# Altium PCB BÖHM_Project.PcbDoc
Units mm, origin at the board's own origin, x right, y up, seen from the top; angles counter-clockwise.
Board outline 106 x 46 mm, 2 copper layers (Top Layer, Bottom Layer); 64 components, 50 nets, 250 pads, 175 vias.
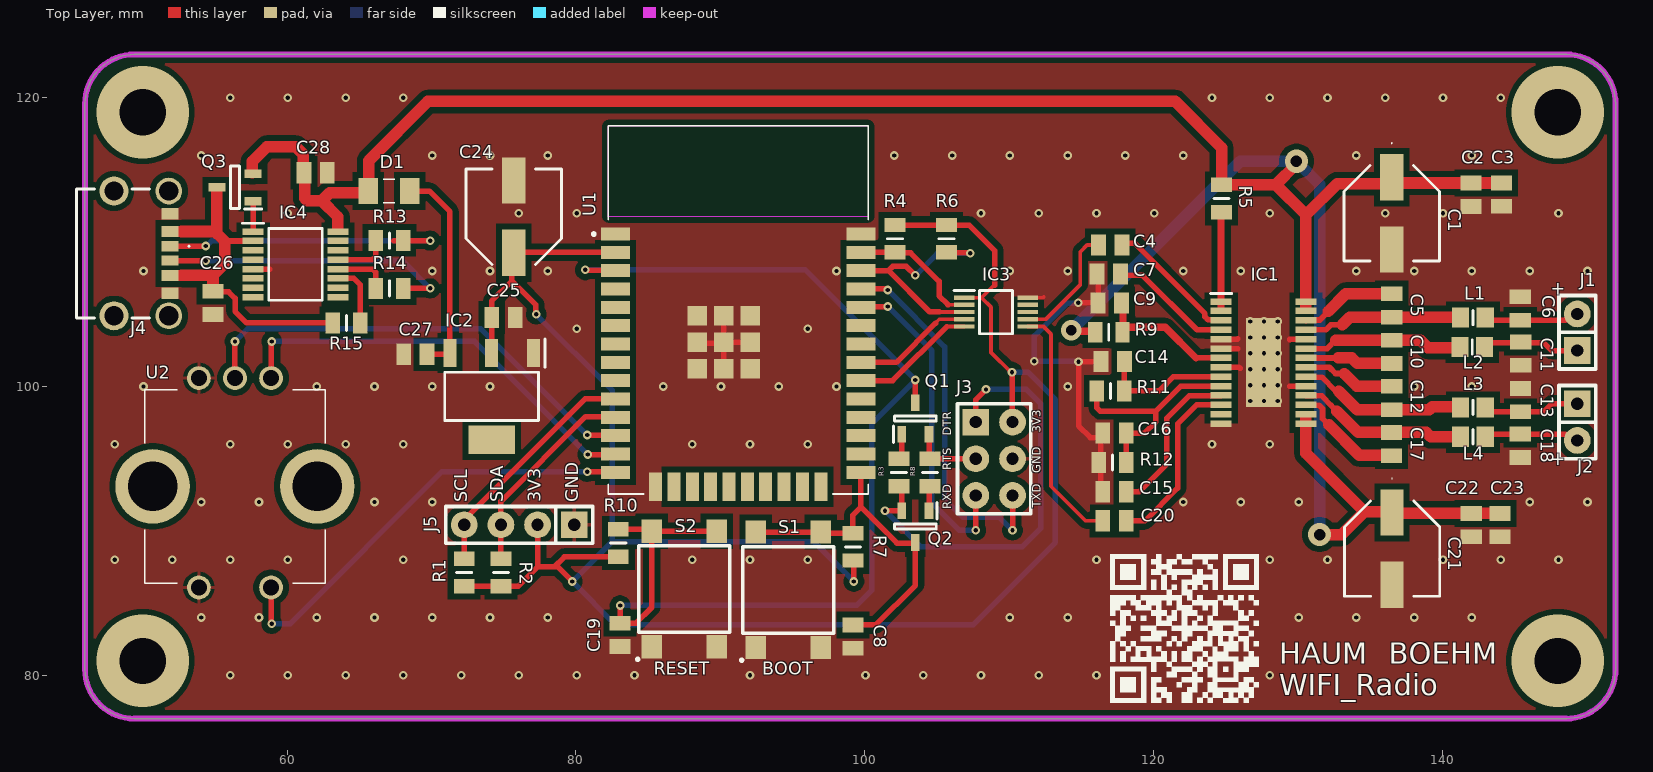
[diagram p0: Top Layer view]
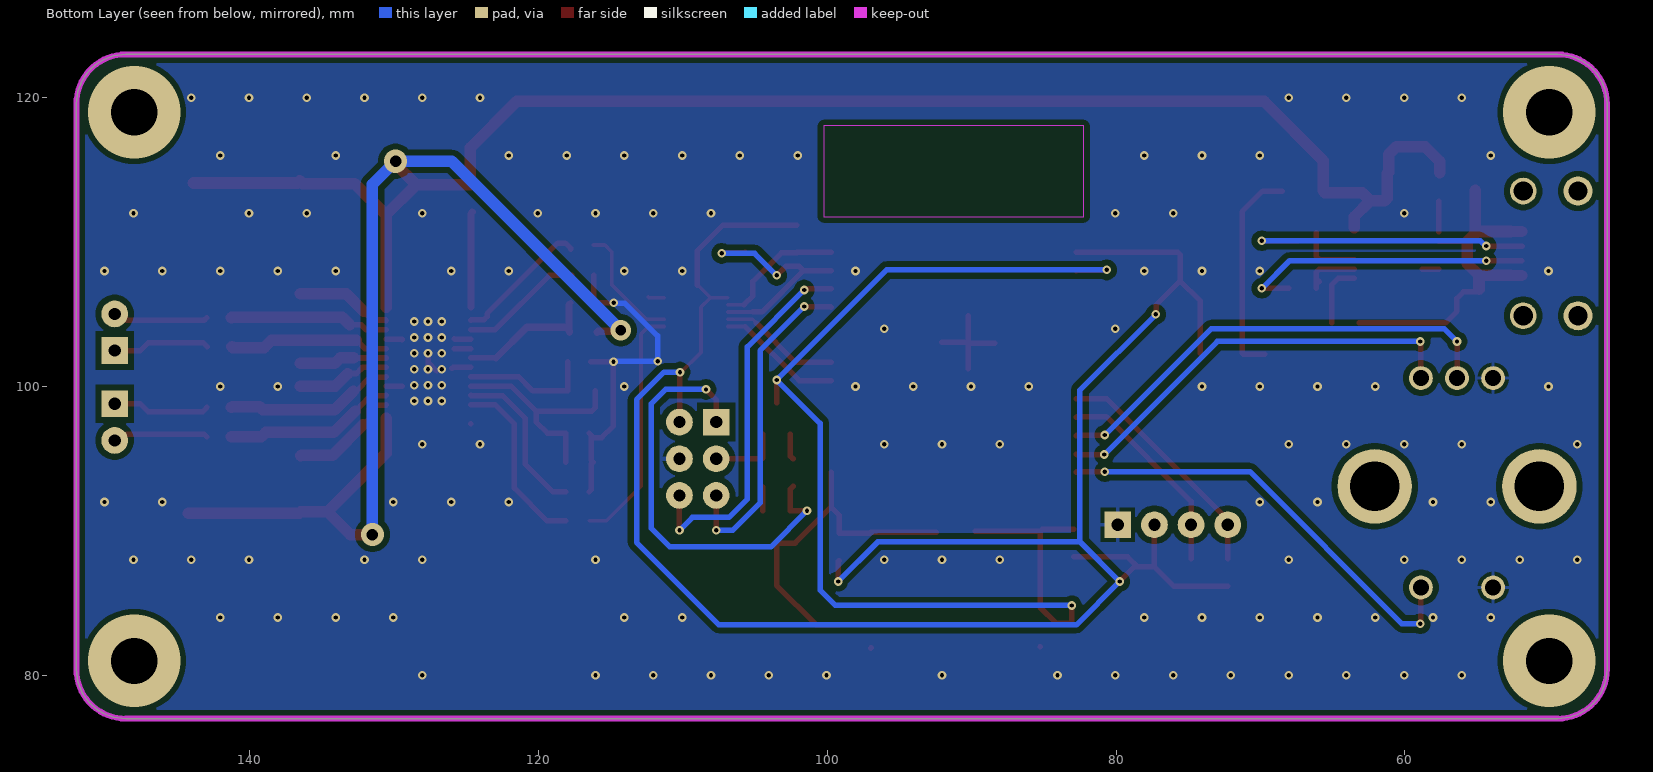
[diagram p1: Bottom Layer view, seen from below]

## Layer stack, top to bottom
Top Solder: solder mask 0.0102, Solder Resist, Dk 3.5
Top Layer: signal copper 0.0356
Dielectric 1: dielectric 0.32, FR-4, Dk 4.8
Bottom Layer: signal copper 0.0356
Bottom Solder: solder mask 0.0102, Solder Resist, Dk 3.5

## Board outline
49.414,77 cw(c49.414,80.414) 46,80.414 46,119.586 cw(c49.414,119.586) 49.414,123 148.586,123 cw(c148.586,119.586) 152,119.586 152,80.414 cw(c148.586,80.414) 148.586,77

## Design rules (kind name [scope] priority, off if disabled: settings)
Clearance [All] p1: gap=0.4 ignorepadtopadclearanceinfootprint=TRUE except(0.2: Arc-Arc Arc-Track Arc-SMDPad Arc-THPad Arc-Via Arc-Text Arc-Hole Track-Track Track-SMDPad Track-THPad Track-Via Track-Text Track-Hole SMDPad-SMDPad SMDPad-THPad SMDPad-Via SMDPad-Text SMDPad-Hole THPad-THPad THPad-Via THPad-Text THPad-Hole Via-Via Via-Text Via-Hole Text-Text Text-Hole)
PolygonConnect [All] p1: thpad.connectstyle=Relief thpad.reliefconductorwidth=0.254 thpad.reliefentries=4 thpad.polygonreliefangle="90 Angle" thpad.airgapwidth=0.254 smdpad.connectstyle=Direct smdpad.reliefconductorwidth=0.254 smdpad.reliefentries=4 smdpad.polygonreliefangle="90 Angle" smdpad.airgapwidth=0.254 via.connectstyle=Direct via.reliefconductorwidth=0.254 via.reliefentries=4 via.polygonreliefangle="90 Angle" via.airgapwidth=0.254
RoutingVias [All] p1: holewidth=0.711 width=1.27 viastyle="Through Hole" minholewidth=0.711 minwidth=1.27 maxholewidth=0.711 maxwidth=1.27
SolderMaskExpansion SolderMaskExpansion_1 [IsVia] p1: expansion=-2 istentingtop=TRUE
SolderMaskExpansion [All] p2: expansion=0.102 istentingtop=FALSE
Width [All] p1: maxlimit=5 minlimit=0.254 preferedwidth=0.35
30 further rules are at their usual default settings.

## Components (designator, comment, footprint, x,y, rotation, side; value= is the part's Value field where it differs from the comment)
C1 "EEE-FN1V101XP" EEE0JA331XP 136.5,112 r270 top
C2 "0.1 uF" CAPC2012X94N 141.986,113.284 r90 top
C3 "1000 pF" CAPC2012X94N 144.1,113.29 r90 top
C4 "1 uF" CAPC2012X94N 117,109.8 r180 top
C5 "0.22 uF" CAPC2012X94N 136.5,105.61 r90 top
C6 "1000 pF" CAPC2012X94N 145.4,105.4 r90 top
C7 "1 uF" CAPC2012X94N 116.9,107.8 r180 top
C8 "100 nF" CAPC2012X94N 99.187,82.677 r270 top
C9 "1 uF" CAPC2012X94N 116.967,105.791 r180 top
C10 "0.22 uF" CAPC2012X94N 136.5,102.4 r90 top
C11 "1000 pF" CAPC2012X94N 145.425,102.275 r270 top
C12 "0.22 uF" CAPC2012X94N 136.5,99.2 r90 top
C13 "1000 pF" CAPC2012X94N 145.415,99.06 r90 top
C14 "1 uF" CAPC2012X94N 117.173,101.727 r0 top
C15 "1 uF" CAPC2012X94N 117.3,92.71 r180 top
C16 "1 uF" CAPC2012X94N 117.3,96.774 r0 top
C17 "0.22 uF" CAPC2012X94N 136.477,96.012 r90 top
C18 "1000 pF" CAPC2012X94N 145.4,95.9 r270 top
C19 "100 nF" CAPC2012X94N 83.058,82.804 r270 top
C20 "1 uF" CAPC2012X94N 117.3,90.7 r180 top
C21 "EEE-FN1V101XP" EEE0JA331XP 136.525,88.773 r270 top
C22 "0.1 uF" CAPC2012X94N 142,90.4 r90 top
C23 "1000 pF" CAPC2012X94N 144,90.4 r90 top
C24 "EEE-FN1V101XP" EEE0JA331XP 75.692,111.76 r90 top
C25 "10 uF" CAPC2012X94N 74.978,104.775 r180 top
C26 "1 uF" CAPC2012X94N 54.864,105.791 r90 top
C27 "10 uF" CAPC2012X94N 68.882,102.235 r180 top
C28 "10 uF" CAPC2012X94N 61.976,114.808 r180 top
D1 "1N4148W_RHG" 1N4148WRHG 67.056,113.538 r180 top
IC1 "TPA3110D2PWP" SOP65P640X120-29N 127.618,101.656 r0 top
IC2 "AMS1117-5.0" SOT290P700X180-4N 74.168,99.314 r270 top
IC3 "MCP4728A0T-E_UNVAO" SOP50P490X110-10N 109.093,105.156 r0 top
IC4 "IP2721" SOP65P640X120-16N 60.579,108.458 r0 top
J1 "CON2" SIP-2 149.352,103.759 r90 top
J2 "CON2" SIP-2 149.352,97.536 r270 top
J3 "CON2x3" PFOSTEN_2x3 108.966,94.996 r270 top
J4 "10164359-00011LF" 1016435900011LF 48.856,109.218 r270 top
J5 "CON4" Sip-4 76.073,90.424 r180 top
L1 "742792031" INDC2012X100N 142.113,104.775 r0 top
L2 "742792031" INDC2012X100N 142.074,102.743 r0 top
L3 "742792031" INDC2012X100N 142.113,98.552 r0 top
L4 "742792031" INDC2012X100N 142.113,96.52 r0 top
Q1 "S8050G" SOT95P240X110-3N 103.505,97.79 r90 top
Q2 "S8050G" SOT95P240X110-3N 103.505,90.297 r270 top
Q3 "AO3400A" SOT95P280X125-3N 56.388,113.792 r180 top
R1 "10 Ω" RESC2012X65N 72.263,87.122 r90 top
R2 "10 Ω" RESC2012X65N 74.803,87.122 r90 top
R3 "10 kΩ" RESC2012X65N 102.362,94.041 r270 top
R4 "10 Ω" RESC2012X65N 102.108,110.236 r270 top
R5 "100 kΩ" RESC2012X65N 124.714,113.03 r90 top
R6 "10 Ω" RESC2012X65N 105.664,110.236 r270 top
R7 "10 kΩ" RESC2012X65N 99.187,88.9 r90 top
R8 "10 kΩ" RESC2012X65N 104.521,94.041 r90 top
R9 "10 Ω" RESC2012X65N 116.901,103.759 r180 top
R10 "10 kΩ" RESC2012X65N 82.931,89.154 r90 top
R11 "10 kΩ" RESC2012X65N 117.033,99.695 r180 top
R12 "10 kΩ" RESC2012X65N 117.16,94.742 r180 top
R13 "5,1 kΩ" RESC2012X65N 67.1,110.1 r180 top
R14 "5,1 kΩ" RESC2012X65N 67.1,106.8 r180 top
R15 "100 kΩ" RESC2012X65N 64.1,104.4 r180 top
S1 "B3FS-1000P" B3FS-1000P 94.706,85.915 r270 top
S2 "B3FS-1000P" B3FS-1000P 87.503,85.979 r270 top
U1 "ESP32-WROOM-32" MODULE_ESP32-WROOM-32 91.24,105.307 r0 top
U2 "PEC11R-4215F-S0012" PEC11R4220FS0024 58.888,86.084 r180 top

## Footprints (in the part's own frame and the unit in brackets; to place one, negate y for a bottom-side part, rotate by r counter-clockwise, add the part's x,y. Pads: shape width x height; smd on the part's side, far side on the other; paste and mask are expansions set on the pad)
1N4148WRHG [mm]
  rect 1.34x1.8 smd: 1(-1.43,0) 2(1.43,0)
  silkscreen extent -0.4,-0.8 0.4,0.8, body extent -1.95,-0.85 1.95,0.85, height 1.15
1016435900011LF [mm]
  rect 0.7x1.2 smd: A5(-0.5,3.03) B5(0.5,3.03)
  rect 0.76x1.2 smd: A9(1.52,3.03) B9(-1.52,3.03)
  rect 0.8x1.2 smd: A12(2.75,3.03) B12(-2.75,3.03)
  round 1.85 hole 1.34: MH1(-4.32,2.95) MH2(4.32,2.95)
  round 2.01 hole 1.34: MH3(-4.32,-0.85) MH4(4.32,-0.85)
  silkscreen extent -4.47,-3.45 4.47,4.4, body extent -4.47,-3.24 4.47,3.66, height 3.25
B3FS-1000P [mm]
  rect 1.6x1.4 smd: 1(4,-2.25) 2(-4,-2.25) 3(4,2.25) 4(-4,2.25)
  silkscreen extent -3,-3.29 4.93,3.15, body extent -4,-3.25 4,3.25, height 3.1
CAPC2012X94N [mm]
  rect 1.02x1.47 smd: 1(-0.81,0) 2(0.81,0)
  body extent -1,-0.63 1,0.63, height 0.94
EEE0JA331XP [mm]
  rect 3.2x1.6 smd: 1(-2.5,0) 2(2.5,0)
  silkscreen extent -4.88,-3.3 3.3,3.3, body extent -3.65,-3.3 3.65,3.3, height 7.7
INDC2012X100N [mm]
  rect 1.2x1.4 smd: 1(-0.85,0) 2(0.85,0)
  silkscreen extent 0,-0.5 0,0.5, body extent -1,-0.6 1,0.6, height 1
MODULE_ESP32-WROOM-32 [mm]
  rect 2x0.9 smd: 1(-8.5,5.26) 2(-8.5,3.99) 3(-8.5,2.72) 4(-8.5,1.45) 5(-8.5,0.18) 6(-8.5,-1.09) 7(-8.5,-2.36) 8(-8.5,-3.63) 9(-8.5,-4.9) 10(-8.5,-6.17) 11(-8.5,-7.44) 12(-8.5,-8.71) 13(-8.5,-9.98) 14(-8.5,-11.25) 25(8.5,-11.25) 26(8.5,-9.98) 27(8.5,-8.71) 28(8.5,-7.44) 29(8.5,-6.17) 30(8.5,-4.9) 31(8.5,-3.63) 32(8.5,-2.36) 33(8.5,-1.09) 34(8.5,0.18) 35(8.5,1.45) 36(8.5,2.72) 37(8.5,3.99) 38(8.5,5.26)
  rect 0.9x2 smd: 15(-5.715,-12.25) 16(-4.445,-12.25) 17(-3.175,-12.25) 18(-1.905,-12.25) 19(-0.635,-12.25) 20(0.635,-12.25) 21(1.905,-12.25) 22(3.175,-12.25) 23(4.445,-12.25) 24(5.715,-12.25)
  rect 1.33x1.33 smd: 39(-2.835,-4.075) 39(-2.835,-2.24) 39(-2.835,-0.405) 39(-1,-4.075) 39(-1,-2.24) 39(-1,-0.405) 39(0.835,-4.075) 39(0.835,-2.24) 39(0.835,-0.405)
  Keep-Out Layer region: 9,6.45 -9,6.45 -9,12.75 9,12.75
  Keep-Out Layer region: 9,6.45 -9,6.45 -9,12.75 9,12.75
  silkscreen extent -10.1,-12.75 9,12.75, body extent -9,-12.75 9,12.75, height 3.2
PEC11R4220FS0024 [mm]
  round 1.65 hole 1.1: 1(0,0) 2(5,0) A1(0,-14.5) B1(5,-14.5) C1(2.5,-14.5)
  round 5.161 hole 3.441: MH1(-3.2,-7) MH2(8.2,-7)
  silkscreen extent -3.75,-13.7 8.75,-0.3, body extent -4.5,-14.7 9.5,0.2, height 26.52
PFOSTEN_2x3 [mm]
  rect 1.85x1.85 hole 0.85 mask+0.102: 1(-2.54,-1.27)
  round 1.85 hole 0.85 mask+0.102: 2(-2.54,1.27) 3(0,-1.27) 4(0,1.27) 5(2.54,-1.27) 6(2.54,1.27)
  silkscreen extent -3.81,-2.54 3.81,2.54
RESC2012X65N [mm]
  rect 1x1.45 smd: 1(-0.95,0) 2(0.95,0)
  silkscreen extent 0,-0.53 0,0.53, body extent -0.77,-0.4 0.77,0.4, height 0.46
SIP-2 [mm]
  rect 1.85x1.85 hole 0.85: 1(-1.27,0)
  round 1.85 hole 0.85: 2(1.27,0)
  silkscreen extent -2.54,-1.27 2.54,1.27
Sip-4 [mm]
  rect 1.85x1.85 hole 0.85: 1(-3.81,0)
  round 1.85 hole 0.85: 2(-1.27,0) 3(1.27,0) 4(3.81,0)
  silkscreen extent -5.08,-1.27 5.08,1.27
SOP50P490X110-10N [mm]
  rect 1.4x0.3 smd: 1(-2.2,1) 2(-2.2,0.5) 3(-2.2,0) 4(-2.2,-0.5) 5(-2.2,-1) 6(2.2,-1) 7(2.2,-0.5) 8(2.2,0) 9(2.2,0.5) 10(2.2,1)
  silkscreen extent -2.9,-1.5 1.15,1.5, body extent -2.45,-1.5 2.45,1.5, height 1.1
SOP65P640X120-16N [mm]
  rect 1.475x0.45 smd: 1(-2.938,2.275) 2(-2.938,1.625) 3(-2.938,0.975) 4(-2.938,0.325) 5(-2.938,-0.325) 6(-2.938,-0.975) 7(-2.938,-1.625) 8(-2.938,-2.275) 9(2.938,-2.275) 10(2.938,-1.625) 11(2.938,-0.975) 12(2.938,-0.325) 13(2.938,0.325) 14(2.938,0.975) 15(2.938,1.625) 16(2.938,2.275)
  silkscreen extent -3.67,-2.48 1.85,2.85, body extent -3.2,-2.48 3.2,2.48, height 1.2
SOP65P640X120-29N [mm]
  rect 1.475x0.45 smd: 1(-2.938,4.225) 2(-2.938,3.575) 3(-2.938,2.925) 4(-2.938,2.275) 5(-2.938,1.625) 6(-2.938,0.975) 7(-2.938,0.325) 8(-2.938,-0.325) 9(-2.938,-0.975) 10(-2.938,-1.625) 11(-2.938,-2.275) 12(-2.938,-2.925) 13(-2.938,-3.575) 14(-2.938,-4.225) 15(2.938,-4.225) 16(2.938,-3.575) 17(2.938,-2.925) 18(2.938,-2.275) 19(2.938,-1.625) 20(2.938,-0.975) 21(2.938,-0.325) 22(2.938,0.325) 23(2.938,0.975) 24(2.938,1.625) 25(2.938,2.275) 26(2.938,2.925) 27(2.938,3.575) 28(2.938,4.225)
  rect 2.4x6.17 smd: 3(0,0)
  silkscreen extent -3.67,4.8 -2.2,4.8, body extent -3.2,-4.85 3.2,4.85, height 1.13
SOT95P240X110-3N [mm]
  rect 1.15x0.6 smd: 1(-1.1,0.95) 2(-1.1,-0.95) 3(1.1,0)
  silkscreen extent -1.68,-1.45 0.18,1.5, body extent -1.2,-1.45 1.2,1.45, height 1.1
SOT95P280X125-3N [mm]
  rect 1.2x0.6 smd: 1(-1.25,0.95) 2(-1.25,-0.95) 3(1.25,0)
  silkscreen extent -1.85,-1.48 0.3,1.5, body extent -1.4,-1.48 1.4,1.48, height 1.25
SOT290P700X180-4N [mm]
  rect 1.95x0.9 smd: 1(-3,2.9) 2(-3,0) 3(-3,-2.9)
  rect 1.95x3.2 smd: 4(3,0)
  silkscreen extent -3.98,-3.25 1.68,3.7, body extent -3.5,-3.25 3.5,3.25, height 1.8

## Part data
C1 C21 C24: "Capacitor Polarised", Manufacturer_Name=Panasonic, Mouser Part Number=667-EEE-FN1V101XP, Arrow Part Number=EEE-FN1V101XP, Arrow Price/Stock=https://www.arrow.com/en/products/eee-fn1v101xp/panasonic, Datasheet Link=http://industrial.panasonic.com/cdbs/www-data/pdf/RDE0000/RDE0000C1259.pdf, Height=7.8mm, Manufacturer_Part_Number=EEE-FN1V101XP, Mouser Price/Stock=https://www.mouser.co.uk/ProductDetail/Panasonic/EEE-FN1V101XP?qs=OlC7AqGiEDmbk%2FCOXeagbw%3D%3D
C2 C3 C4 C5 C6 C7 C8 C9 C10 C11 C12 C13 C14 C15 C16 C17 C18 C19 C20 C22 C23 C25 C26 C27 C28: library part 04026W105KAT2A, "Capacitor", Manufacturer_Name="Kyocera AVX", Mouser Part Number=581-04026W105KAT2A, Datasheet Link=http://www.mouser.com/catalog/supplier/library/pdf/AVXSurfaceMountCeramic.pdf, Height=0.56mm, Manufacturer_Part_Number=04026W105KAT2A, Mouser Price/Stock=https://www.mouser.co.uk/ProductDetail/KYOCERA-AVX/04026W105KAT2A?qs=QKPlp7%252B%252BMySX2WX75ls0%252Bw%3D%3D
D1: "Diode", Arrow Part Number="1N4148W RHG", Manufacturer_Name="Taiwan Semiconductor", Mouser Part Number=821-1N4148WRHG, Arrow Price/Stock=https://www.arrow.com/en/products/1n4148wrhg/taiwan-semiconductor?region=europe, Datasheet Link="https://mouser.componentsearchengine.com/Datasheets/1/1N4148W RHG.pdf", Height=1.15mm, Manufacturer_Part_Number="1N4148W RHG", Mouser Price/Stock=https://www.mouser.co.uk/ProductDetail/Taiwan-Semiconductor/1N4148W-RHG?qs=KwaGCOX4wIag2YPLXylAvA%3D%3D
IC1: "Integrated Circuit", Manufacturer_Name="Texas Instruments", Mouser Part Number=595-TPA3110D2PWP, Arrow Part Number=TPA3110D2PWP, Arrow Price/Stock=https://www.arrow.com/en/products/tpa3110d2pwp/texas-instruments?region=nac, Datasheet Link=http://componentsearchengine.com/Datasheets/3/TPA3110D2PWP.pdf, Height=1.2mm, Manufacturer_Part_Number=TPA3110D2PWP, Mouser Price/Stock=https://www.mouser.co.uk/ProductDetail/Texas-Instruments/TPA3110D2PWP?qs=%252BoZa6nMD7VtKcnryxAFqkA%3D%3D
IC2: "Integrated Circuit", Manufacturer_Name=Shikues, Datasheet Link=https://datasheet.lcsc.com/szlcsc/SK-AMS1117-5-0_C165483.pdf, Height=1.8mm, Manufacturer_Part_Number=AMS1117-5.0
IC3: "Integrated Circuit", Arrow Part Number=MCP4728A0T-E/UNVAO, Manufacturer_Name=Microchip, Mouser Part Number=579-MCP4728A0TEUNVAO, Arrow Price/Stock=https://www.arrow.com/en/products/mcp4728a0t-eunvao/microchip-technology, Datasheet Link=https://www.arrow.com/en/products/mcp4728a0t-eunvao/microchip-technology, Height=1.1mm, Manufacturer_Part_Number=MCP4728A0T-E/UNVAO, Mouser Price/Stock=https://www.mouser.co.uk/ProductDetail/Microchip-Technology/MCP4728A0T-E-UNVAO?qs=5aG0NVq1C4xwp5%2FuVndkIg%3D%3D
IC4: "Integrated Circuit", Manufacturer_Name=INJOINIC, Datasheet Link=https://datasheet.lcsc.com/szlcsc/2006111335_INJOINIC-IP2721_C603176.pdf, Height=1.2mm, Manufacturer_Part_Number=IP2721
J1 J2 J3 J5: "Stecker"
J4: "Connector", Manufacturer_Name=Amphenol, Mouser Part Number=649-10164359-00011LF, Arrow Part Number=10164359-00011LF, Arrow Price/Stock=https://www.arrow.com/en/products/10164359-00011lf/amphenol-fci?region=nac, Datasheet Link=https://cdn.amphenol-cs.com/media/wysiwyg/files/drawing/10164359.pdf, Height=3.41mm, Manufacturer_Part_Number=10164359-00011LF, Mouser Price/Stock=https://www.mouser.co.uk/ProductDetail/Amphenol-FCI/10164359-00011LF?qs=MyNHzdoqoQLpQ%2FmSqA1%252BtQ%3D%3D
L1 L2 L3 L4: "Inductor", Manufacturer_Name="Wurth Elektronik", Mouser Part Number=710-742792031, Datasheet Link=https://componentsearchengine.com/Datasheets/2/742792031.pdf, Height=1mm, Manufacturer_Part_Number=742792031, Mouser Price/Stock=https://www.mouser.co.uk/ProductDetail/Wurth-Elektronik/742792031?qs=Wn16VcyqZWp8eQwMnPa%252Bwg%3D%3D
Q1 Q2: "Transistor BJT NPN", Manufacturer_Name=Galaxy, Height=1.1mm, Manufacturer_Part_Number=S8050G
Q3: "MOSFET (N-Channel)", Manufacturer_Name="Alpha & Omega Semiconductors", Arrow Part Number=AO3400A, Arrow Price/Stock=https://www.arrow.com/en/products/ao3400a/alpha-and-omega-semiconductor?utm_currency=USD&region=nac, Datasheet Link=http://aosmd.com/res/data_sheets/AO3400A.pdf, Height=1.25mm, Manufacturer_Part_Number=AO3400A
R1 R2 R3 R4 R5 R6 R7 R8 R9 R10 R11 R12 R13 R14 R15: library part CPF0805B102RE1, "Resistor", Manufacturer_Name="TE Connectivity", Datasheet Link=http://docs-europe.electrocomponents.com/webdocs/13d1/0900766b813d116f.pdf, Height=0.65mm, Manufacturer_Part_Number=CPF0805B102RE1
S1 S2: "Switch", Manufacturer_Name="Omron Electronics", Mouser Part Number=653-B3FS-1000P, Arrow Part Number=B3FS-1000P, Arrow Price/Stock=https://www.arrow.com/en/products/b3fs-1000p/omron?region=nac, Datasheet Link=https://www.omron.co.jp/ecb/products/pdf/b3fs.pdf, Manufacturer_Part_Number=B3FS-1000P, Mouser Price/Stock=https://www.mouser.co.uk/ProductDetail/Omron-Electronics/B3FS-1000P?qs=ImaqFqjHA4k6odVF2%2FXWpQ%3D%3D
U1: "Bluetooth, WiFi 802.11b/g/n, Bluetooth v4.2 +EDR, Class 1, 2 and 3 Transceiver Module 2.4GHz ~ 2.5GHz Antenna Not Included, U.FL Surface Mount", Package="Module Espressif Systems", Availability="In Stock", Check_prices=https://www.snapeda.com/parts/ESP32-WROOM-32/Espressif+Systems/view-part/?ref=eda, MF="Espressif Systems", MP=ESP32-WROOM-32, Price=None, Purchase-URL=https://pricing.snapeda.com/search/part/ESP32-WROOM-32/?ref=eda, SnapEDA_Link=https://www.snapeda.com/parts/ESP32-WROOM-32/Espressif+Systems/view-part/?ref=snap
U2: "Undefined or Miscellaneous", Manufacturer_Name=Bourns, Mouser Part Number=652-PEC11R-4215F-S12, Arrow Part Number=PEC11R-4215F-S0012, Arrow Price/Stock=https://www.arrow.com/en/products/pec11r-4215f-s0012/bourns?utm_currency=USD&region=nac, Datasheet Link=https://www.bourns.com/docs/Product-Datasheets/PEC11R.pdf, Height=27.5mm, Manufacturer_Part_Number=PEC11R-4215F-S0012, Mouser Price/Stock=https://www.mouser.co.uk/ProductDetail/Bourns/PEC11R-4215F-S0012?qs=Zq5ylnUbLm4GqzIkqVmW4Q%3D%3D

## Via types
v1: diameter 0.6, hole 0.3, Top Layer to Bottom Layer, tented both sides, 150 vias
v2: diameter 0.6, hole 0.3, Top Layer to Bottom Layer, 18 vias
v3: diameter 6.4, hole 3.2, Top Layer to Bottom Layer, 4 vias
v4: diameter 1.6, hole 0.8, Top Layer to Bottom Layer, tented both sides, 2 vias
v5: diameter 1.4, hole 0.7, Top Layer to Bottom Layer, tented both sides, 1 vias

## Nets (pads, with @x,y where several pads share a name; then routed paths per layer and width w, separated by ;. In a path a pad name is that pad's centre, name@x,y a point inside that pad or via, vN(x,y) a via of type N, cw(c..) or ccw(c..) an arc to the next point about the centre after c; other vN are vias at no path point)
3,3V: C24.1 C25.2 IC2.2 IC3.1 J3.2 J5.2 R1.1 R2.1 R4.1 R6.1 R7.1 R10.1 U1.2 | length 147.7
  Top Layer w0.254: IC3.1 108.094,106.156 ; 109,107 108.938,107 108.094,106.156 ; v1(110.2,101) 110.106,101 108.75,102.356 108.75,105.5 108.094,106.156
  Top Layer w0.381: R1.1 R2.1 76.012,86.172 77.343,87.503 ; IC2.2 C25.2 74.168,105.918 75.562,107.312 ; v1(77.25,105) 77.208,105.042 77.208,105.665 75.562,107.312 ; J5.2 77.343,87.503 ; v1(79.75,86.5) 78.747,87.503 78.497,87.503 ; U1.2 75.729,109.297 75.562,109.13 75.562,107.312 ; R10.1 79.198,88.204 78.497,87.503 ; R7.1 99.25,87.887 v1(99.25,86.5) ; R4.1 107.228,111.186 109,109.414 109,107 ; v1(110.2,101) 110.218,100.982 110.218,97.554 J3.2 ; 77.343,87.503 78.497,87.503
  Bottom Layer w0.381: v1(77.25,105) 82.5,99.75 82.5,89.25 ; v1(99.25,86.5) 96.5,89.25 82.5,89.25 ; v1(110.2,101) 111.3,101 113.2,99.1 113.2,89.2 107.5,83.5 82.75,83.5 v1(79.75,86.5) 82.5,89.25
12V: C1.1 C2.2 C3.2 C21.1 C22.2 C23.2 C28.2 D1.2 IC1.15 IC1.16 IC1.27 IC1.28 IC4.16 Q3.2 R5.2 R9.2 | length 181.6
  Top Layer w0.5: v5(114.3,103.9) 114.371,103.83 115.88,103.83 R9.2
  Top Layer w0.8: Q3.2@57.591,114.8 57.591,115.591 58.602,116.602 60.598,116.602 61.12,116.08 61.12,114.854 C28.2 61.214,114.76 61.214,113.036 61.389,112.861 62.399,112.861 ; 63.517,111 63.517,111.743 62.399,112.861 ; D1.2@65.556,113.411 62.948,113.411 62.399,112.861 ; D1.2 65.645,113.557 65.645,115.645 69.75,119.75 121.5,119.75 124.714,116.536 R5.2 128.463,113.98 ; v4(129.9,115.6) 129.9,115.417 128.463,113.98 ; 130.556,97.8 IC1.15 130.556,95.377 134.615,91.318 ; 130.556,105.5 IC1.28 130.556,111.887 ; v4(131.5,89.75) 133.046,89.75 134.615,91.318 ; C23.2@143.891,91.234 136.564,91.234 C21.1 136.48,91.318 134.615,91.318 ; C3.2@143.891,114.094 C2.2 136.691,114.094 136.525,114.26 136.311,114.046 132.715,114.046 130.556,111.887 ; C23.2 C23.2@144.254,91.21 ; 128.463,113.98 130.556,111.887
  Bottom Layer w0.8: v5(114.3,103.9) 126,115.6 v4(129.9,115.6) 131.5,114 v4(131.5,89.75)
"Audio L": C4.2 IC3.7 | length 8.4
  Top Layer w0.254: IC3.7 111.301,104.648 112.522,104.648 114.935,107.061 114.935,109.335 115.4,109.8 C4.2
"Audio R": C20.2 IC3.6 | length 16.9
  Top Layer w0.254: IC3.6 112.379,104.156 112.903,103.632 112.903,93.091 115.294,90.7 C20.2
CC1: J4.A5 R13.1 | length 20.7
  Top Layer w0.381: J4.A5 51.891,109.723 54.351,109.723 v1(54.356,109.728) ; 67.371,110.109 67.38,110.1 R13.1 v1(69.9,110.1)
  Bottom Layer w0.381: v1(54.356,109.728) 54.415,109.728 54.787,110.1 v1(69.9,110.1)
CC1_2: IC4.13 R13.2 | length 4.4
  Top Layer w0.381: IC4.13 65.927,108.783 66.15,109.006 R13.2@66.15,110.656
CC2: J4.B5 R14.1 | length 20.6
  Top Layer w0.381: J4.B5@51.892,108.712 v1(54.356,108.712) ; R14.1 v1(69.9,106.8)
  Bottom Layer w0.381: v1(54.356,108.712) 67.988,108.712 v1(69.9,106.8)
CC2_2: IC4.12 R14.2 | length 4.4
  Top Layer w0.381: IC4.12 65.927,108.133 66.15,107.91 R14.2@66.15,107.486 ; R14.2 R14.2@66.15,107.334 ; R14.2@66.15,107.334 R14.2@66.15,107.486 ; R14.2@66.15,107.334 66.071,107.255 65.919,107.255 R14.2@66.15,107.486
DTR: J3.1 Q2.2 R3.2 | length 30.7
  Top Layer w0.381: v1(101.4,91.4) 102.552,91.4 Q2.2 102.555,92.898 R3.2 ; J3.1 107.696,99.096 v1(108.4,99.8)
  Bottom Layer w0.381: v1(101.4,91.4) 103.9,88.9 110.9,88.9 112.2,90.2 112.2,98.8 111.2,99.8 v1(108.4,99.8)
EN: C19.1 Q1.3 R10.2 S2.2 S2.4 U1.3 | length 79.4
  Top Layer w0.381: v1(80.645,108.077) 80.67,108.052 82.715,108.052 U1.3 ; R10.2 85.128,90.104 S2.2 ; v1(83.058,84.836) C19.1 84.153,83.614 85.253,84.714 S2.2 ; S2.4 S2.2 ; Q1.3 v1(103.505,100.457)
  Bottom Layer w0.381: v1(80.645,108.077) 95.885,108.077 v1(103.505,100.457) 100.5,97.452 100.5,85.9 99.436,84.836 v1(83.058,84.836)
GND: C1.2 C2.1 C3.1 C6.2 C7.2 C8.2 C9.2 C11.2 C13.2 C14.1 C15.2 C16.1 C18.2 C19.2 C21.2 C22.1 C23.1 C24.2 C25.1 C26.1 C27.2 C28.1 IC1.5 IC1.6 IC1.8 IC1.14 IC1.19 IC1.24 IC2.1 IC3.10 IC4.5 J3.4 J4.A12 J4.B12 J5.1 R12.2 S1.1 S1.3 S2.1 S2.3 U1.1 U1.15 U1.38 U1.39 U2.2 U2.B1 | length 40
  Top Layer w0.254: IC3.10 112.343,106.156 112.393,106.206
  Top Layer w0.381: IC4.5 58.753,108.133 58.779,108.108 ; S2.1@85.238,81.994 S2.1 ; U1.39@88.405,103 U1.39@90.24,103 ; U1.39@90.24,101.232 U1.39@90.24,103 ; U1.39@90.24,104.902 U1.39@90.24,103.067 ; U1.39@92.075,103.067 U1.39@90.24,103.067 ; S1.3 S1.3@97.004,81.867 ; v1(114.792,105.807) 116.141,105.807 C9.2 C7.2@116.157,107.696 ; C14.1 v1(114.808,101.727) 114.808,97.282 115.632,96.458 116.174,96.458 C16.1@116.35,96.634 ; C15.2 116.35,92.85 116.35,94.602 R12.2 116.35,94.882 C16.1@116.35,96.634 ; C16.1 C16.1@116.35,96.634 ; IC1.14 IC1.14@124.702,97.409 ; IC1.8 125.919,101.331 126,101.25 ; IC1.6 125.792,102.631 125.817,102.606 ; IC1.5 125.792,103.281 125.817,103.306 ; 129.418,100.006 129.444,100.031 IC1.19 ; 129.418,103.256 129.444,103.281 IC1.24 ; U1.39@90.24,103 U1.39@90.24,103.067
  Bottom Layer w0.381: v1(114.792,105.807) 114.75,105.765 114.015,105.765 111.75,103.5 v1(111.75,101.75) 111.762,101.738 114.797,101.738 v1(114.808,101.727)
  other v1: 56.05,80 60.05,80 64.05,80 68.05,80 72.05,80 76.05,80 80.05,80 84.05,80 92.05,80 100.05,80 104.05,80 108.05,80 112.05,80 116.05,80 128.05,80 54.05,84 58.05,84 62.05,84 66.05,84 70.05,84 74.05,84 78.05,84 110.05,84 114.05,84 130.05,84 134.05,84 138.05,84 142.05,84 48.05,88 52.05,88 56.05,88 60.05,88 68.05,88 88.05,88 92.05,88 96.05,88 116.05,88 128.05,88 132.05,88 140.05,88 144.05,88 148.05,88 54.05,92 58.05,92 66.05,92 70.05,92 122.05,92 126.05,92 130.05,92 146.05,92 150.05,92 48.05,96 56.05,96 60.05,96 64.05,96 68.05,96 88.05,96 92.05,96 96.05,96 124.05,96 128.05,96 50.05,100 62.05,100 66.05,100 70.05,100 74.05,100 86.05,100 90.05,100 94.05,100 98.05,100 114.05,100 138.05,100 142.05,100 80.05,104 96.05,104 50.05,108 70.05,108 74.05,108 78.05,108 98.05,108 110.05,108 114.05,108 122.05,108 126.05,108 134.05,108 138.05,108 142.05,108 146.05,108 150.05,108 60.05,112 76.05,112 80.05,112 108.05,112 112.05,112 116.05,112 120.05,112 128.05,112 136.05,112 140.05,112 148.05,112 54.05,116 70.05,116 74.05,116 78.05,116 102.05,116 106.05,116 110.05,116 114.05,116 118.05,116 122.05,116 134.05,116 142.05,116 56.05,120 60.05,120 64.05,120 68.05,120 124.05,120 128.05,120 132.05,120 136.05,120 140.05,120 144.05,120
IO0: C8.1 Q2.3 R7.2 S1.2 S1.4 U1.25 | length 24.4
  Top Layer w0.381: S1.2 S1.4 97.021,89.85 R7.2 99.187,91.096 99.74,91.649 ; C8.1 100.759,83.487 103.505,86.233 Q2.3 103.462,89.154 102.235,89.154 99.74,91.649 ; U1.25 99.74,91.649
IO12: U1.14 U2.1 | length 30.7
  Top Layer w0.381: U2.1 58.908,86.064 58.908,83.586 v1(58.928,83.566) ; v1(80.772,94.107) 80.797,94.082 82.715,94.082 U1.14
  Bottom Layer w0.381: v1(58.928,83.566) 60.198,83.566 70.739,94.107 v1(80.772,94.107)
IO13: U1.12 U2.C1 | length 32.3
  Top Layer w0.381: U2.C1 v1(56.388,103.124) ; v1(80.772,96.647) 80.797,96.622 82.715,96.622 U1.12
  Bottom Layer w0.381: v1(56.388,103.124) 57.277,104.013 73.406,104.013 v1(80.772,96.647)
IO14: U1.13 U2.A1 | length 29.6
  Top Layer w0.381: U2.A1 58.908,100.604 58.908,103.104 v1(58.928,103.124) ; v1(80.81,95.288) 82.701,95.288 U1.13
  Bottom Layer w0.381: v1(58.928,103.124) 72.975,103.124 v1(80.81,95.288)
IO18: IC3.4 U1.31 | length 8.4
  Top Layer w0.254: 104.902,104.394 104.902,104.402 105.156,104.656 IC3.4
  Top Layer w0.381: U1.31 102.185,101.677 104.902,104.394
IO19: IC3.5 U1.30 | length 8.7
  Top Layer w0.254: 105.664,104.156 IC3.5
  Top Layer w0.381: U1.30 101.932,100.407 105.664,104.139
IO32: IC3.2 R4.2 U1.37 | length 9.2
  Top Layer w0.254: 105.781,105.674 105.799,105.656 IC3.2
  Top Layer w0.381: U1.37 R4.2@102.049,109.297 ; R4.2 102.131,109.263 103.181,109.263 105.156,107.289 105.156,106.284 105.767,105.674 105.781,105.674
IO33: J5.4 R1.2 U1.10 | length 16.6
  Top Layer w0.381: R1.2 72.263,90.763 80.637,99.137 U1.10
IO34: J5.3 R2.2 U1.11 | length 14.4
  Top Layer w0.381: R2.2 J5.3 74.803,92.053 80.667,97.917 82.69,97.917 U1.11
IO35: IC3.3 R6.2 U1.36 | length 16.7
  Top Layer w0.254: 105.164,105.174 105.164,105.164 105.171,105.156 IC3.3
  Top Layer w0.381: U1.36 101.65,108.027 ; v1(103.505,107.696) 102.87,108.331 101.954,108.331 101.65,108.027 ; 105.164,105.174 104.504,105.174 101.65,108.027 ; R6.2 105.697,109.253 107.282,109.253 v1(107.315,109.22)
  Bottom Layer w0.381: v1(103.505,107.696) 105.029,109.22 v1(107.315,109.22)
NetC4_1: C4.1 | length 9.5
  Top Layer w0.381: C4.1@117.777,109.501 117.777,109.579 118.13,109.932 118.668,109.932 123.552,105.048 123.552,104.844 123.781,104.615 124.646,104.615 124.68,104.581
NetC5_1: C5.1 IC1.25 L1.1 | length 11.1
  Top Layer w0.381: IC1.25 131.931,103.931 132.279,104.279 133.079,104.279
  Top Layer w0.8: 133.079,104.279 133.6,104.8 C5.1 136.513,104.787 141.25,104.787 L1.1
NetC5_2: C5.2 IC1.26 | length 6.7
  Top Layer w0.4: IC1.26 130.581,104.606 131.506,104.606 132.1,105.2
  Top Layer w0.8: 132.1,105.2 133.32,106.42 C5.2
NetC6_1: C6.1 J1.2 L1.2 | length 6.6
  Top Layer w0.381: L1.2 143.148,104.59 148.515,104.59 148.954,105.029 J1.2
NetC7_1: C7.1 IC1.4 | length 8.5
  Top Layer w0.381: C7.1@117.71,107.7 119.245,107.7 123.015,103.931 IC1.4
NetC9_1: C9.1 IC1.7 R9.1 | length 9.8
  Top Layer w0.381: C9.1 117.88,105.688 C9.1@117.904,105.664 ; 122.936,101.981 IC1.7
  Top Layer w0.5: R9.1 117.851,103.85 118.101,104.1 120.817,104.1 122.936,101.981 ; R9.1@117.88,104 C9.1@117.88,105.688
NetC10_1: C10.1 IC1.22 | length 6.1
  Top Layer w0.4: IC1.22 132.781,101.981
  Top Layer w0.8: 132.781,101.981 133.719,101.981 134.1,101.6 C10.1@136.49,101.6
NetC10_2: C10.2 IC1.23 L2.1 | length 11.1
  Top Layer w0.381: IC1.23 132.031,102.631 132.61,103.21
  Top Layer w0.8: 132.61,103.21 138.49,103.21 139,102.7 141.181,102.7 L2.1
NetC11_1: C11.1 J1.1 L2.2 | length 6.8
  Top Layer w0.381: L2.2 143.226,103.045 145.415,103.045 147.018,103.045 147.574,102.489 J1.1
NetC12_1: C12.1 IC1.20 L3.1 | length 11.8
  Top Layer w0.381: IC1.20 130.591,100.646 131.654,100.646 132.6,99.7 132.819,99.681
  Top Layer w0.8: 132.82,99.681 134.11,98.39 C12.1 139.09,98.39 139.3,98.6 141.215,98.6 L3.1
NetC12_2: C12.2 IC1.21 | length 6.5
  Top Layer w0.4: IC1.21 132.169,101.331 132.6,100.9 133.2,100.9
  Top Layer w0.8: 133.2,100.9 134.09,100.01 C12.2
NetC13_1: C13.1 J2.1 L3.2 | length 6.7
  Top Layer w0.381: L3.2 143.265,98.25 C13.1 147.018,98.25 147.574,98.806 J2.1
NetC14_2: C14.2 IC1.9 R11.1 | length 9.1
  Top Layer w0.381: C14.2 R11.1 120.396,99.695 121.382,100.681 IC1.9
NetC15_1: C15.1 IC1.11 | length 11.2
  Top Layer w0.381: C15.1 118.999,92.71 120.904,94.615 120.904,97.79 122.46,99.346 124.645,99.346 IC1.11
NetC16_2: C16.2 IC1.10 R11.2 R12.1 | length 15.7
  Top Layer w0.381: R11.2 116.083,98.521 116.306,98.298 120.162,98.298 ; R12.1 C16.2 119.38,96.774 120.162,97.556 120.162,98.298 ; IC1.10 121.895,100.031 120.162,98.298
NetC17_1: C17.1 IC1.17 | length 7.8
  Top Layer w0.4: IC1.17 130.581,98.706 131.459,98.706 131.709,98.456 131.709,97.791 132.151,97.349
  Top Layer w0.8: 132.151,97.349 134.25,95.25 136.429,95.25 C17.1
NetC17_2: C17.2 IC1.18 L4.1 | length 11.9
  Top Layer w0.381: IC1.18 130.591,99.346 131.654,99.346 132.3,98.7 132.7,98.3
  Top Layer w0.8: 132.7,98.3 134.178,96.822 C17.2 138.89,96.822 139.192,96.52 L4.1
NetC18_1: C18.1 J2.2 L4.2 | length 6.7
  Top Layer w0.381: L4.2 143.153,96.71 148.51,96.71 148.954,96.266 J2.2
NetC20_1: C20.1 IC1.12 | length 12.5
  Top Layer w0.381: C20.1 119.402,90.7 121.666,92.964 121.666,97.409 122.988,98.731 IC1.12
NetC27_1: C27.1 D1.1 IC2.3 | length 14.8
  Top Layer w0.381: D1.1 69.85,113.538 71.268,112.12 IC2.3 71.189,102.235 C27.1
NetIC1_1: IC1.1 IC1.2 R5.1 | length 6.6
  Top Layer w0.5: R5.1@124.587,112.08 124.68,111.987 IC1.1 124.68,105.5
NetIC4_11: IC4.11 R15.1 | length 4.4
  Top Layer w0.381: IC4.11 64.617,107.483 65.05,107.05 R15.1
NetQ1_1: Q1.1 R3.1 | length 1.8
  Top Layer w0.381: R3.1 102.555,95.184 Q1.1
NetQ2_1: Q2.1 R8.1 | length 1.7
  Top Layer w0.381: Q2.1 104.455,93.025 R8.1
RTS: J3.3 Q1.2 R8.2 | length 4.9
  Top Layer w0.381: Q1.2 104.455,95.057 R8.2 104.523,94.994 107.694,94.994 J3.3
RXD: J3.5 U1.34 | length 23
  Top Layer w0.381: U1.34 99.765,105.512 101.575,105.512 v1(101.6,105.537) ; v1(107.696,90.043) J3.5
  Bottom Layer w0.381: v1(101.6,105.537) 104.648,102.489 104.648,91.948 106.553,90.043 v1(107.696,90.043)
TXD: J3.6 U1.35 | length 26
  Top Layer w0.381: U1.35 101.464,106.757 101.541,106.68 v1(101.6,106.68) ; v1(110.236,90.043) J3.6
  Bottom Layer w0.381: v1(101.6,106.68) 105.537,102.743 105.537,92.202 106.807,90.932 109.347,90.932 v1(110.236,90.043)
VBUSG: IC4.1 Q3.1 | length 2.1
  Top Layer w0.381: IC4.1@57.638,110.736 Q3.1
VIN: C26.2 IC4.2 J4.A9 J4.B9 Q3.3 R15.2 | length 25.4
  Top Layer w0.381: C26.2 54.912,106.553 55.947,106.553 56.4,106.1 56.4,105.2 57.2,104.4 R15.2
  Top Layer w0.4: 55.689,110.045 55.727,110.083 IC4.2
  Top Layer w0.76: J4.A9 52.7,107.698 ; J4.B9 52.7,110.738
  Top Layer w0.8: 52.7,107.698 54.866,107.698 ; 52.7,110.738 54.997,110.738 55.138,110.597 ; C26.2@54.866,106.73 54.866,107.698 ; Q3.3@55.138,113.6 55.138,110.597 ; 54.866,107.698 55.689,108.521 55.689,110.045 55.138,110.597
pads on no net: IC1.3 IC1.13 IC2.4 IC3.8 IC3.9 IC4.3 IC4.4 IC4.6 IC4.7 IC4.8 IC4.9 IC4.10 IC4.14 IC4.15 J4.MH1 J4.MH2 J4.MH3 J4.MH4 U1.4 U1.5 U1.6 U1.7 U1.8 U1.9 U1.16 U1.17 U1.18 U1.19 U1.20 U1.21 U1.22 U1.23 U1.24 U1.26 U1.27 U1.28 U1.29 U1.32 U1.33 U2.MH1 U2.MH2
copper on no net: | length 2
  Top Layer w0.381: 127.052,101.09 127.618,101.656 ; v2@127.618,101.04 127.618,101.656 ; v2@127.618,102.271 127.618,101.656
  other v2: 126.7,99 127.65,99 128.6,99 126.7,100.1 127.65,100.1 128.6,100.1 126.7,101.2 127.65,101.2 128.6,101.2 126.7,102.3 127.65,102.3 128.6,102.3 126.7,103.4 127.65,103.4 128.6,103.4 126.7,104.5 127.65,104.5 128.6,104.5
  other v3: 50,81 148,81 50,119 148,119

## Polygon pours and split planes (outlines as drawn)
GND on Bottom Layer "GND_L02_P001" (solid, remove dead copper, pour order 1): 42.16,128.428 42.41,128.678 155.91,128.678 155.91,71.928 42.91,71.928
GND on Top Layer "GND_L01_P000" (solid, remove dead copper, pour order 0): 44.811,124 152.7,124 152.7,76.4 45.442,76.4

## Keep-outs
Keep-Out Layer:
  lines w0.4: 46,80.414 ccw(c49.414,80.414) 49.414,77 94,77 148.586,77 ccw(c148.586,80.414) 152,80.414 152,119.586 ccw(c148.586,119.586) 148.586,123 49.414,123 ccw(c49.414,119.586) 46,119.586 46,80.414

## Silkscreen, mask and mechanical layers (free items; w line width, h text height)
Top Overlay:
  drawing of 60 lines, arcs and shapes, not listed
  text "+" at 147.5,106.042 h1.52
  text "3V3" at 112.389,96.8 h1 r90
  text "DTR" at 106.2,96.6 h1 r90
  text "+" at 147.5,94.242 h1.52
  text "RTS" at 106.189,94.2 h1 r90
  text "GND" at 112.389,94 h1 r90
  text "SCL" at 72.783,92 h1.52 r90
  text "SDA" at 75.283,92 h1.52 r90
  text "3V3" at 77.883,92 h1.52 r90
  text "GND" at 80.483,92 h1.52 r90
  text "TXD" at 112.4,91.6 h1 r90
  text "RXD" at 106.2,91.5 h1 r90
  text "HAUM" at 128.7,80.328 h2.5
  text "BOEHM" at 136.3,80.328 h2.5
  text "RESET" at 85.4,79.717 h1.52
  text "BOOT" at 92.9,79.717 h1.52
  text "WIFI_Radio" at 128.7,78.144 h2.5
Board Shape:
  lines w0.7: 46,80.414 ccw(c49.414,80.414) 49.414,77 148.586,77 ccw(c148.586,80.414) 152,80.414 152,119.586 ccw(c148.586,119.586) 148.586,123 57,123 49.414,123 ccw(c49.414,119.586) 46,119.586 46,104 46,80.414

## Text inside footprints (layer, text, board x,y; h text height)
U1: Top 3D Body "ANTENNA" at 85.24,114.307 h1.78